# EAGLE board Schematic (EAGLE 9.6.2)
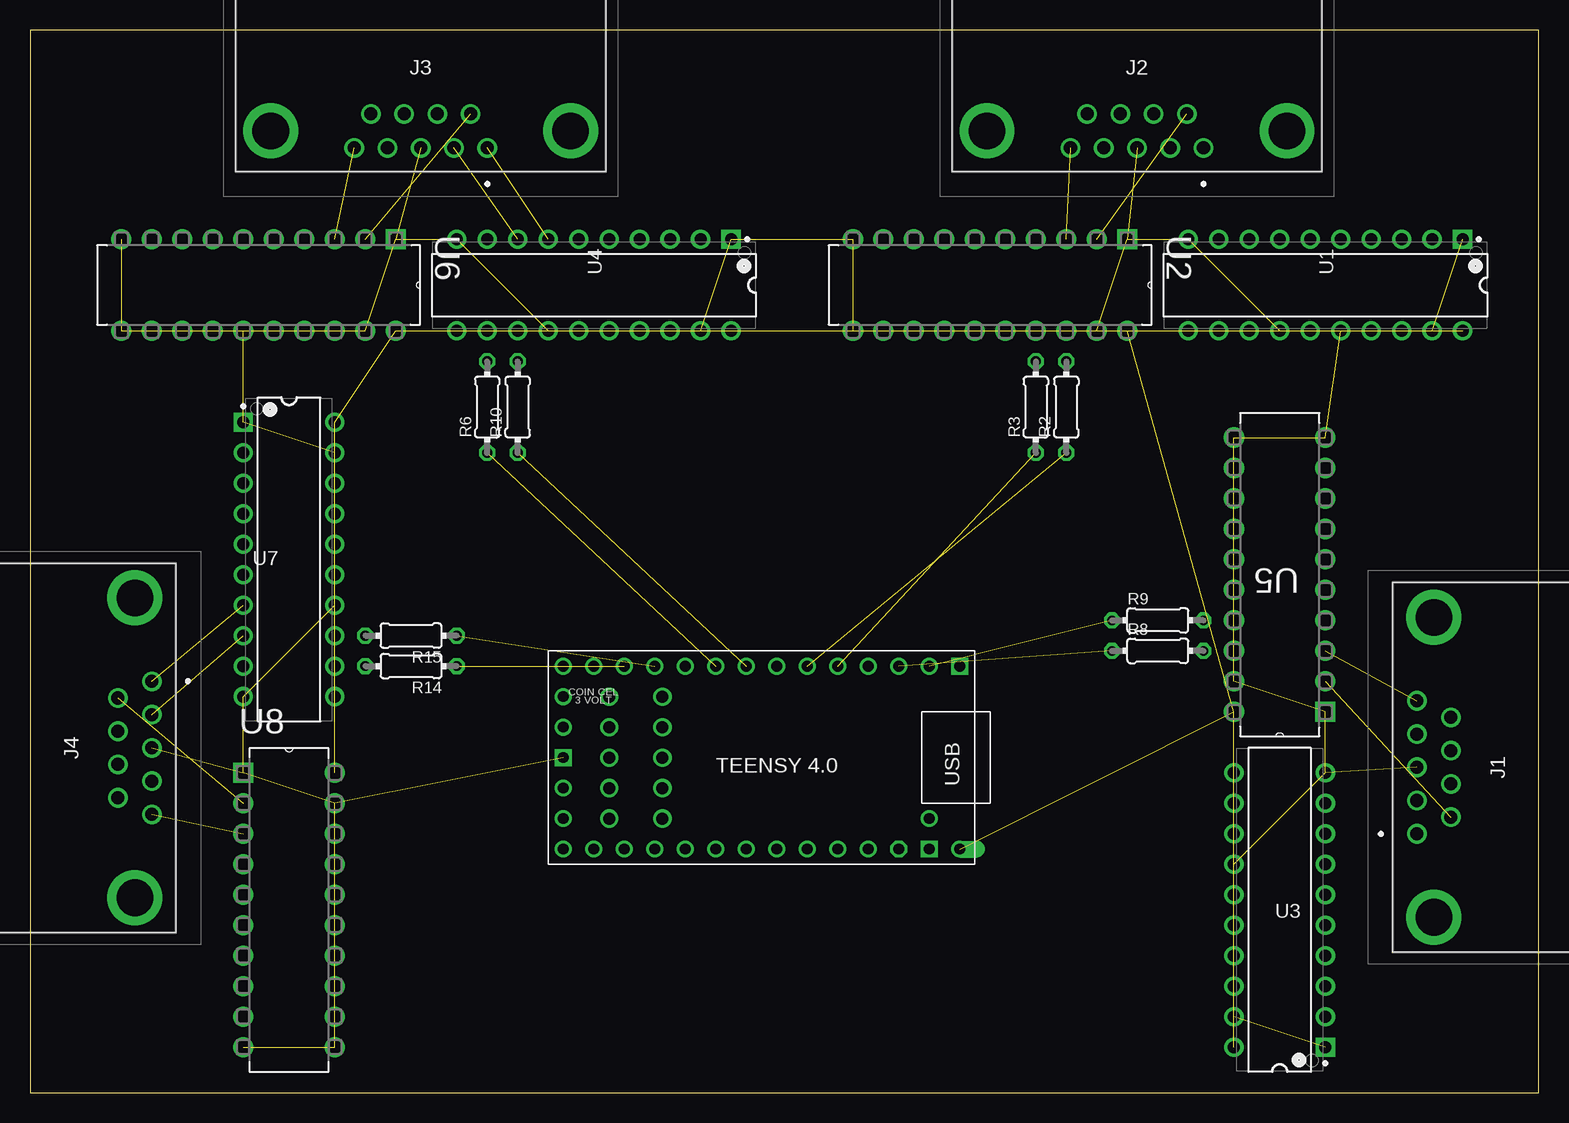
[diagram p0: board, top side]
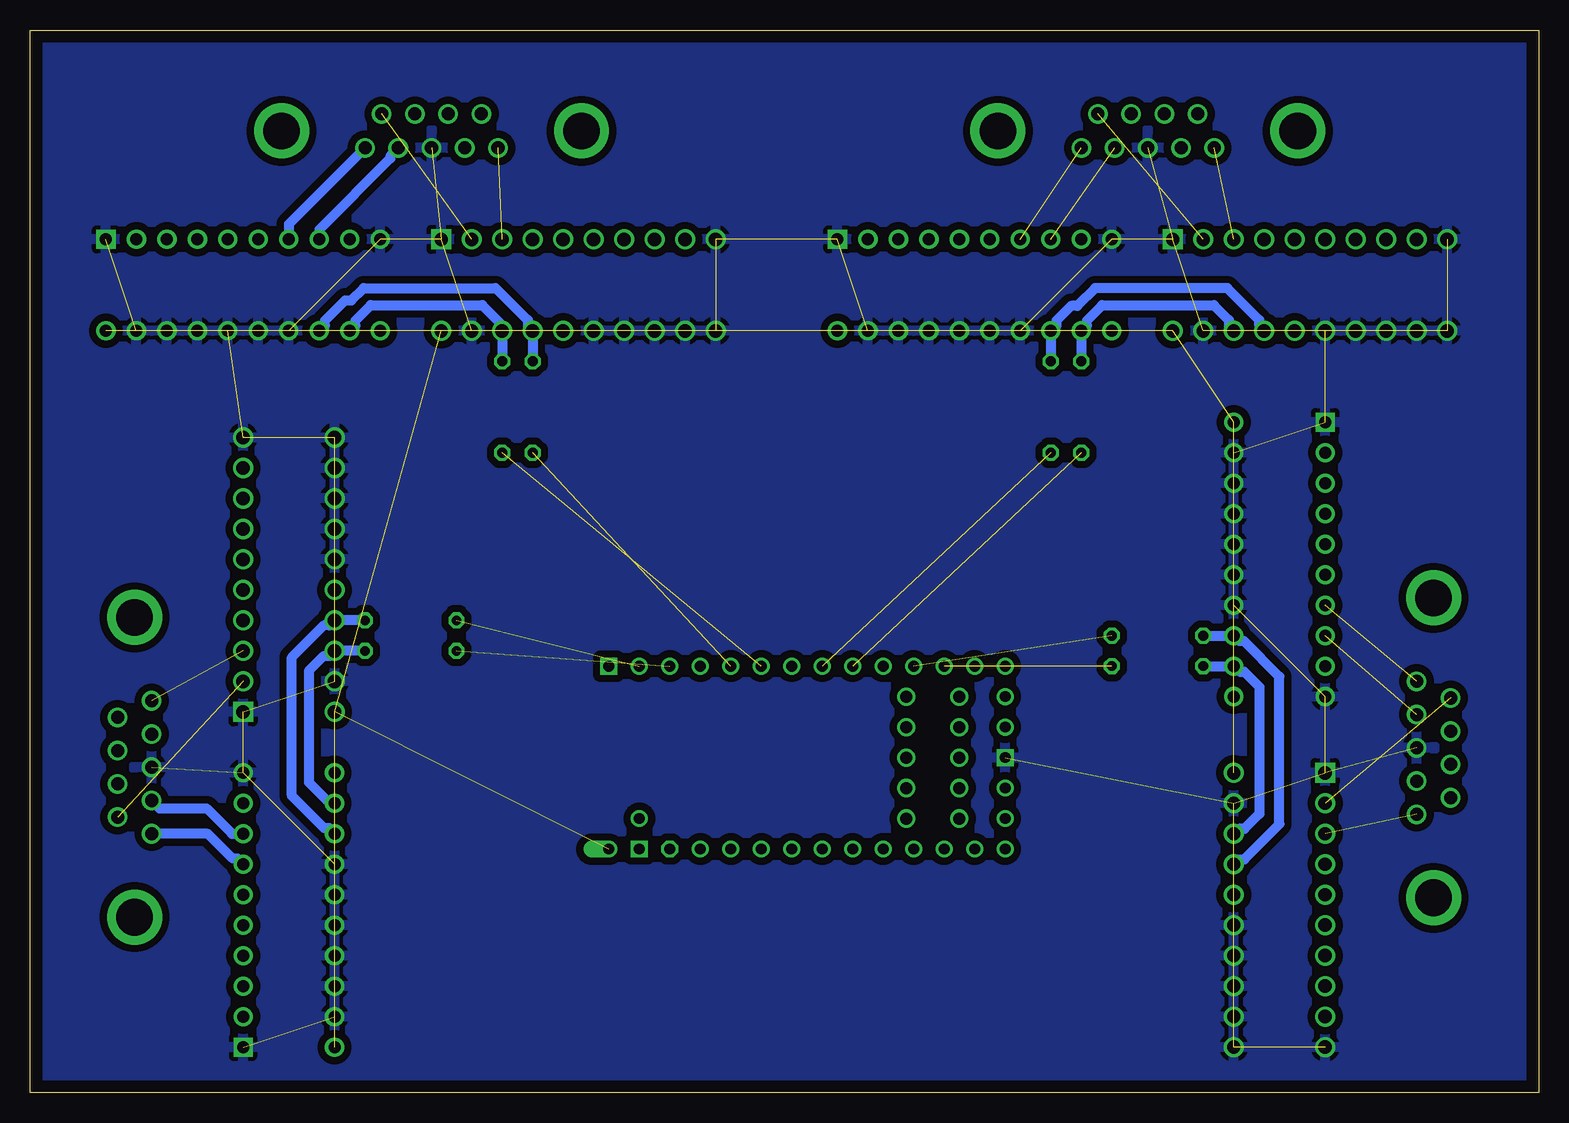
[diagram p1: board, bottom side, seen from below]

Size 125.71 x 88.57 mm. Coordinates in mm from the lower left corner, seen from the top.
Outline: 0,0 125.71,0 125.71,88.57 0,88.57 0,0
Copper layers (1*16): Top 0.035mm / dielectric 1.5mm / Bottom 0.035mm
Design rules "Teknikfag": minimum track width 32mil, minimum drill 0.1mm, track to track 24mil, track to pad 24mil, pad to pad 6mil, via to via 6mil, smd to smd 6mil, copper to edge 40mil, drill to drill 6mil, minimum pad ring 10mil, minimum via ring 8mil, stop-mask expansion 4mil, vias tented up to drill 0mil, thermal gap 15mil

## Footprints (pad centres in the part's own frame; a part is rotated, then mirrored left to right if it is on the bottom)
182009113R531 = drill 1.09 pad 1.635: 1 0,0; 2 1.385,-2.84; 3 2.77,0; 4 4.155,-2.84; 5 5.54,0; 6 6.925,-2.84; 7 8.31,0; 8 9.695,-2.84; 9 11.08,0 | drill 3.05 pad 4.575: MH1 -6.956,-1.42; MH2 18.036,-1.42
0204/7 = drill 0.813 octagon: 1 -3.81,0; 2 3.81,0
TEXAS_INSTRUMENTS_SN54LS245_0 = drill 1 pad 1.6 square: 1 -3.81,11.43 | drill 1 pad 1.6: 2 -3.81,8.89; 3 -3.81,6.35; 4 -3.81,3.81; 5 -3.81,1.27; 6 -3.81,-1.27; 7 -3.81,-3.81; 8 -3.81,-6.35; 9 -3.81,-8.89; 10 -3.81,-11.43; 11 3.81,-11.43; 12 3.81,-8.89; 13 3.81,-6.35; 14 3.81,-3.81; 15 3.81,-1.27; 16 3.81,1.27; 17 3.81,3.81; 18 3.81,6.35; 19 3.81,8.89; 20 3.81,11.43
DIP254P762X508-20 = drill 1.118 square: 1 -7.62,22.86 | drill 1.118: 2 -7.62,20.32; 3 -7.62,17.78; 4 -7.62,15.24; 5 -7.62,12.7; 6 -7.62,10.16; 7 -7.62,7.62; 8 -7.62,5.08; 9 -7.62,2.54; 10 -7.62,0; 11 0,0; 12 0,2.54; 13 0,5.08; 14 0,7.62; 15 0,10.16; 16 0,12.7; 17 0,15.24; 18 0,17.78; 19 0,20.32; 20 0,22.86
TEENSY40 = drill 0.9: 0-RX1 -13.97,-7.62; 1-TX1 -11.43,-7.62; 2-OUT2 -8.89,-7.62; 3-LRCLK2 -6.35,-7.62; 3V3-2 16.51,-2.54; 4-BCLK2 -3.81,-7.62; 5-IN2 -1.27,-7.62; 6-OUT1D 1.27,-7.62; 7-RX2/OUT1A 3.81,-7.62; 8-TX2/IN1 6.35,-7.62; 9-OUT1C 8.89,-7.62; 10-CS/MQSR 11.43,-7.62; 11-MOSI/CTX1 13.97,-7.62; 12-MIO/MQSL 16.51,-7.62; 13-SCK/CRX1/LED 16.51,7.62; 14-A0/TX3/S-PFI_OUT 13.97,7.62; 15-A1/RX3/S-PDIF_IN 11.43,7.62; 16-A2/RX4/SCL1 8.89,7.62; 17-A3/TX4/SDA1 6.35,7.62; 18-A4/SDA0 3.81,7.62; 19-A5/SCL0 1.27,7.62; 20-A6/TX5/LRCLK1 -1.27,7.62; 21-A7/RX5/BCLK1 -3.81,7.62; 22-A8/CTX1 -6.35,7.62; 23-A9/CRX1/CCLK1 -8.89,7.62; ON/OFF 16.51,5.08; PROGRAM 16.51,2.54; VBAT 16.51,-5.08; VUSB -13.97,5.08 | drill 0.9 octagon: 3V3-1 -11.43,7.62 | drill 1: 24-A10/TX6/SCL2 12.7,5.08; 25-A11/SDA2 8.255,5.08; 26-A12/MOSI1 12.7,2.54; 27-A13/SCK1 8.255,2.54; 28-RX7 12.7,0; 29-TX7 8.255,0; 30-CRX3 12.7,-2.54; 31-CTX3 8.255,-2.54; 32-OUTB1 12.7,-5.08; 33-MCLK2 8.255,-5.08 | drill 0.9 square: GND1 -16.51,-7.62; GND2 16.51,0; GND3 -13.97,7.62 | drill 0.9 offset: VIN -16.51,7.62

## Placement (x,y rotation side)
J1  182-009-113R531  [182009113R531]  115.57,21.59 90 top
J2  182-009-113R531  [182009113R531]  97.79,78.74 180 top
J3  182-009-113R531  [182009113R531]  38.1,78.74 180 top
J4  182-009-113R531  [182009113R531]  10.16,34.29 270 top
R2  400  [0204/7]  86.36,57.15 90 top
R3  400  [0204/7]  83.82,57.15 90 top
R6  400  [0204/7]  38.1,57.15 90 top
R8  400  [0204/7]  93.98,36.83 0 top
R9  400  [0204/7]  93.98,39.37 0 top
R10  400  [0204/7]  40.64,57.15 90 top
R14  400  [0204/7]  31.75,35.56 180 top
R15  400  [0204/7]  31.75,38.1 180 top
U1  TEXAS_INSTRUMENTS_SN54LS245TEXAS_INSTRUMENTS_SN54LS245_0_0  [TEXAS_INSTRUMENTS_SN54LS245_0]  107.95,67.31 270 top
U2  SN74LS640N  [DIP254P762X508-20]  68.58,63.5 270 top
U3  TEXAS_INSTRUMENTS_SN54LS245TEXAS_INSTRUMENTS_SN54LS245_0_0  [TEXAS_INSTRUMENTS_SN54LS245_0]  104.14,15.24 180 top
U4  TEXAS_INSTRUMENTS_SN54LS245TEXAS_INSTRUMENTS_SN54LS245_0_0  [TEXAS_INSTRUMENTS_SN54LS245_0]  46.99,67.31 270 top
U5  SN74LS640N  [DIP254P762X508-20]  100.33,54.61 180 top
U6  SN74LS640N  [DIP254P762X508-20]  7.62,63.5 270 top
U7  TEXAS_INSTRUMENTS_SN54LS245TEXAS_INSTRUMENTS_SN54LS245_0_0  [TEXAS_INSTRUMENTS_SN54LS245_0]  21.59,44.45 0 top
U8  SN74LS640N  [DIP254P762X508-20]  25.4,3.81 0 top
U$1  TEENSY40  [TEENSY40]  60.96,27.94 180 top

## Library data of the parts
J1-J4 = SamacSys_Parts; DESCRIPTION: NORCOMP - 182-009-113R531 - D SUB, PLUG, SOLDER, RIGHT ANGLE, 9WAY; HEIGHT: 12.55mm; MANUFACTURER_NAME: NorComp; MANUFACTURER_PART_NUMBER: 182-009-113R531; MOUSER_PART_NUMBER: 636-182-009-113R531; MOUSER_PRICE-STOCK: https://www.mouser.co.uk/ProductDetail/NorComp/182-009-113R531?qs=QVSbBo1cBBTeggoiUtmnzA%3D%3D
R2 R3 R6 R8-R10 R14 R15 = Teknikfag komponenter; SPICEPREFIX: R
U1 U3 U4 U7 = SN54LS245; CIIVA_IDS: 2979989; DATASHEET_VERSION: SDLS146A; FOOTPRINT_VARIANT_NAME_0: Manufacturer Recommended; IMPORTED: yes; IMPORTED_FROM: vault; IMPORT_TS: 1521844992; INPUT_TYPE: TTL; MF: Texas Instruments; MPN: SN54LS245; OPERATING_TEMPERATURE_RANGEC: -55 to 125; OUTPUT_TYPE: TTL; PACKAGE: J0020A; PREFIX: U; RATING: Military; RELEASE_DATE: 1459330087; SCHMITT_TRIGGER: No; TECHNOLOGY_FAMILY: LS; VAULT_GUID: 8A10EBEE-09F4-4ECB-9B30-69BD58852236; VAULT_REVISION: 008853CE-E1C2-4D4E-AAEB-0AEE99FFA7D1; VCC_MAX_V: 5.5; VCC_MIN_V: 4.5
U2 U5 U6 U8 = SN74LS640N; AVAILABILITY: Warning; DESCRIPTION: Octal bus transceivers 20-PDIP 0 to 70; MF: Texas Instruments; MP: SN74LS640N; PACKAGE: PDIP-20 Texas Instruments; PRICE: None; PURCHASE-URL: https://pricing.snapeda.com/search/part/SN74LS640N/?ref=eda
U$1 = teensy

## Nets
+5V: U1.20 U2.20 U3.20 U4.20 U5.20 U6.20 U7.20 U8.20 U$1.VIN
/A1: J1.2 U5.2
/A2: J2.2 U2.2
/A3: J3.2 U6.2
/A4: J4.2 U8.2
/B1: J1.9 U5.3
/B2: J2.9 U2.3
/B3: J3.9 U6.3
/B4: J4.9 U8.3
A1: J1.3 U3.8
A2: J2.3 U1.8
A3: J3.3 U4.8
A4: J4.3 U7.8
B1: J1.1 U3.7
B2: J2.1 U1.7
B3: J3.1 U4.7
B4: J4.1 U7.7
GND: J1.5 J2.5 J3.5 J4.5 U1.1 U1.10 U1.14 U1.15 U1.16 U1.17 U1.18 U1.19 U2.1 U2.10 U2.11 U2.12 U2.13 U2.14 U2.15 U2.19 U3.1 U3.10 U3.14 U3.15 U3.16 U3.17 U3.18 U3.19 U4.1 U4.10 U4.14 U4.15 U4.16 U4.17 U4.18 U4.19 U5.1 U5.10 U5.11 U5.12 U5.13 U5.14 U5.15 U5.19 U6.1 U6.10 U6.11 U6.12 U6.13 U6.14 U6.15 U6.19 U7.1 U7.10 U7.14 U7.15 U7.16 U7.17 U7.18 U7.19 U8.1 U8.10 U8.11 U8.12 U8.13 U8.14 U8.15 U8.19 U$1.GND2
IA1: R8.2 U3.12 U5.18
IA2: R2.2 U1.12 U2.18
IA3: R6.2 U4.12 U6.18
IA4: R14.2 U7.12 U8.18
IB1: R9.2 U3.13 U5.17
IB2: R3.2 U1.13 U2.17
IB3: R10.2 U4.13 U6.17
IB4: R15.2 U7.13 U8.17
JA1: R8.1 U$1.1-TX1
JA2: R2.1 U$1.4-BCLK2
JA3: R6.1 U$1.7-RX2/OUT1A
JA4: R14.1 U$1.10-CS/MQSR
JB1: R9.1 U$1.0-RX1
JB2: R3.1 U$1.3-LRCLK2
JB3: R10.1 U$1.6-OUT1D
JB4: R15.1 U$1.9-OUT1C
JZ1: U$1.2-OUT2
JZ2: U$1.5-IN2
JZ3: U$1.8-TX2/IN1
JZ4: U$1.11-MOSI/CTX1

## Tracks (layer width: path | path; a pad name or v marks a point on that pad's centre or on a via)
+5V  (8 unrouted)
/A1  (1 unrouted)
/A2  (1 unrouted)
/A3  (1 unrouted)
/A4  (1 unrouted)
/B1  (1 unrouted)
/B2  (1 unrouted)
/B3  (1 unrouted)
/B4  (1 unrouted)
A1
  Bottom 0.813: J1.3 114.92,23.71 110.99,23.71 108.87,21.59 U3.8
A2
  Bottom 0.813: J2.3 95.67,78.09 95.67,77.86 101.6,71.93 U1.8
A3  (1 unrouted)
A4  (1 unrouted)
B1
  Bottom 0.813: U3.7 108.41,19.52 108.81,19.52 110.88,21.59 J1.1
B2
  Bottom 0.813: J2.1 104.14,72.39 U1.7
B3  (1 unrouted)
B4  (1 unrouted)
GND  (68 unrouted)
  pour Bottom: -20.32,93.98 -20.32,-20.32 151.13,-20.32 151.13,99.06 -20.32,99.06
IA1
  Bottom 0.813: R8.2 U5.18 100.74,36.42 101.21,36.42 102.46,35.17 102.46,25.87 100.72,24.13 U3.12
IA2
  Bottom 0.813: U1.12 98.59,63.97 98.59,64.36 97.32,65.63 88.02,65.63 86.36,63.98 U2.18 R2.2
IA3
  Bottom 0.813: U6.18 25.81,63.91 25.81,64.38 27.06,65.63 36.36,65.63 37.64,64.36 37.64,63.97 U4.12 R6.2
IA4
  Bottom 0.813: R14.2 U7.12 24.93,35.09 24.54,35.09 23.27,33.82 23.27,23.25 24.52,22 24.99,22 U8.18
IB1
  Bottom 0.813: R9.2 U5.17 100.74,38.96 101.21,38.96 103.89,36.29 103.89,24.75 101.19,22.06 100.8,22.06 U3.13
IB2
  Bottom 0.813: U1.13 101.13,63.97 101.13,64.36 99.45,66.04 98.93,66.04 97.91,67.06 86.9,67.06 84.23,64.38 84.23,63.91 U2.17 R3.2
IB3
  Bottom 0.813: U6.17 23.27,63.91 23.27,64.38 25.94,67.06 36.95,67.06 38.43,65.58 38.96,65.58 40.17,64.36 40.17,63.97 U4.13 R10.2
IB4
  Bottom 0.813: R15.2 U7.13 24.93,37.64 24.54,37.64 21.59,34.68 21.59,22.38 24.52,19.46 24.99,19.46 U8.17
JA1  (1 unrouted)
JA2  (1 unrouted)
JA3  (1 unrouted)
JA4  (1 unrouted)
JB1  (1 unrouted)
JB2  (1 unrouted)
JB3  (1 unrouted)
JB4  (1 unrouted)